# Altium PCB PCB_Prototype.PcbDoc (part 2 of 2)
Units mil, origin at the board's own origin, x right, y up, seen from the top; angles counter-clockwise.
Board outline 3779.53 x 2992.13 mil, 2 copper layers (Top Layer, Bottom Layer), stack 12.8 mil thick; 97 components, 82 nets, 386 pads, 139 vias.
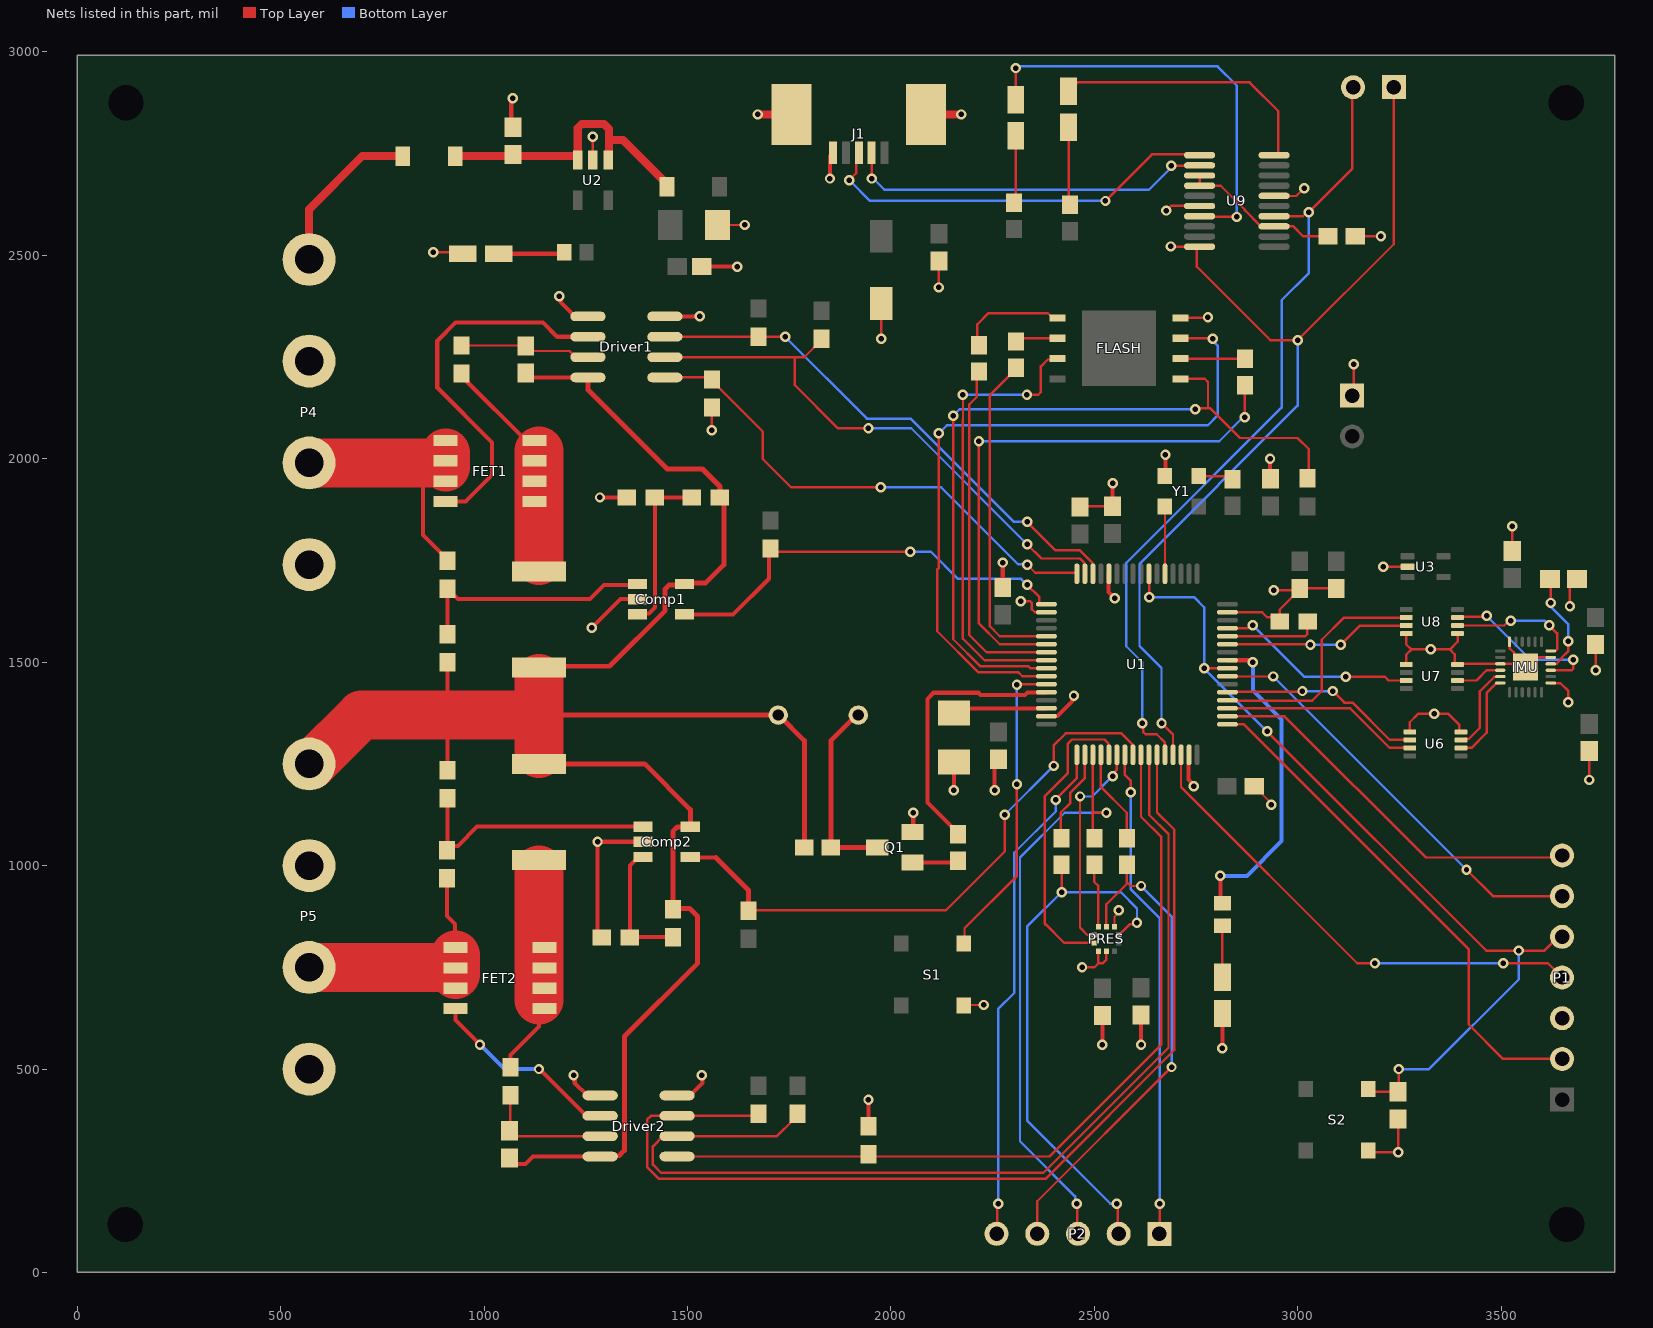
[diagram p2: the nets of this part, all layers, seen from the top]

## Via types
v1: diameter 25.5, hole 13.5, Top Layer to Bottom Layer, 76 vias
v2: diameter 25.5, hole 13.5, Top Layer to Bottom Layer, tented both sides, 54 vias
v3: diameter 27.56, hole 11.81, Top Layer to Bottom Layer, 9 vias

## Nets (pads, with @x,y where several pads share a name; then routed paths per layer and width w, separated by ;. In a path a pad name is that pad's centre, name@x,y a point inside that pad or via, vN(x,y) a via of type N, cw(c..) or ccw(c..) an arc to the next point about the centre after c; other vN are vias at no path point) (continued)
CS_IMU_1.8V: IMU.22 U7.2 | length 113.5
  Top Layer w6: U7.2@3392.99,1455.16 3439.41,1455.16 3464.57,1480.32 IMU.22@3496.06,1480.32
CS_TELE: P2.5 U1.33 | length 1259.3
  Top Layer w6: P2.5@2260,95 2261.89,96.89 2261.89,167.4 v1(2263.78,169.29) ; v1(2405.51,1161.42) 2405.51,1163.9 2457.36,1215.75 U1.33@2457.36,1272.56
  Bottom Layer w6: v1(2263.78,169.29) 2263.78,647.51 2303.49,687.22 2303.49,1031.83 2405.51,1133.86 v1(2405.51,1161.42)
GND: C1.2 C2.2 C3.1 C6.2 C7.2 C8.2 C9.2 C10.2 C11.2 C12.2 C13.2 C14.1 C15.2 C16.2 C17.1 C18.2 C19.2 C20.2 C21.1 C22.2 C23.2 C24.2 Comp1.2 Comp2.2 Driver1.4 Driver1.5 Driver2.4 Driver2.5 FLASH.4 IMU.7 IMU.11 IMU.18 IMU.21 IMU.25 J1.5 J1.6 J1.7 LED.2 P1.3 P4.1 P4.3 P5.1 P5.3 P6.1 PRES.3 PRES.8 PRES.9 PWR.2 Q1.2 R5.2 R20.1 R22.1 R29.1 R31.1 S1.2 S2.2 U1.12 U1.18 U1.31 U1.47 U1.63 U2.2 U3.2 U6.4 U6.5 U7.4 U7.5 U8.4 U8.5 U9.6 U9.16 Y1.2 | length 5069.7
  Top Layer w6: v1(875,2507.87) 943.9,2507.87 PWR.2@947.83,2503.94 ; U2.2@1267.72,2734.45 v1(1267.72,2791.34) ; v1(1560,2070) R20.1@1560,2126.1 ; C14.1@1573.82,2574.8 v1(1640.75,2574.8) ; v1(1976.38,2295.28) C22.2@1976.38,2381.89 ; v1(2118.11,2421.26) C23.2@2118.11,2486.22 ; S1.2@2179.13,656.5 2180.12,657.48 v1(2228.35,657.48) ; v2(2319,1650) 2342.45,1650 2345.97,1646.49 2345.97,1631.03 2354,1623 2361.25,1623 2361.3,1622.95 U1.18@2382.56,1622.95 ; U1.31@2382.56,1367.05 U1.31@2383.34,1367.83 ; v2@2446.43,1413.83 v2(2450.16,1417.56) ; C16.2@2460,1883.46 2543.46,1883.46 C15.2@2545,1885 ; v2(2470,750) 2500,750 2510,760 2510,789.57 PRES.8@2510.31,789.88 ; 2510.31,760.32 2521.32,760.32 2530,769 PRES.9@2530,789.88 ; C20.2@2519.76,611.3 C20.2@2520,611.54 ; U1.12@2535.32,1716.66 U1.12@2536.1,1717.44 ; PRES.3@2549.68,850.12 2549.68,874.41 2560,884.72 v2(2560,890) ; v1(2677.17,2610.24) 2677.85,2610.24 2689.32,2621.7 2758.51,2621.7 U9.16@2758.86,2621.36 ; FLASH.4@2712.2,2346.46 2712.8,2347.05 2778.94,2347.05 v1(2779.53,2347.64) v1@2783.46,2347.64 ; U1.63@2827.44,1622.95 2912.48,1622.95 2925.2,1610.24 2935.91,1610.24 2937.01,1609.14 R5.2@2937.01,1606.3 ; C9.2@2893.47,1195 2935,1153.47 v2(2935,1150) ; R5.2@2938.43,1614.17 R5.2@2940.94,1614.17 ; v1(2940.94,1677.17) C10.2@2996.06,1677.17 ; U9.6@2941.93,2646.36 2942.27,2646.01 2996.41,2646.01 v1(3015.75,2665.35) ; R5.2@2942.6,1610 R5.2@2950,1610 ; R5.2@2955.55,1600 2955.55,1629.13 2996.06,1669.65 C10.2@2996.06,1677.17 ; C13.2@3080,1680 3078.47,1681.53 C10.2@3005,1681.53 3000.63,1677.17 C10.2@2996.06,1677.17 ; P6.1@3137.8,2155.12 v1(3137.8,2232.28) ; C24.2@3141.73,2547.24 3142.09,2546.89 3142.44,2547.24 v1(3204.72,2547.24) ; S2.2@3158.15,284.45 S2.2@3158.94,285.24 ; S2.2@3166.81,295.55 v2(3246.81,295.55) ; v1(3210,1735) U3.2@3270,1735 ; v2@3246.81,300.55 C6.2@3246.81,377.09 ; U7.5@3267.01,1494.53 3267.01,1518.98 3279.53,1531.5 ; U8.4@3267.01,1570.47 3267.01,1544.02 3279.53,1531.5 ; U6.5@3275.59,1328.74 3275.59,1352.52 3295.98,1372.91 v1(3335.35,1372.91) 3370.79,1372.91 3397.64,1346.06 U6.4@3397.64,1330.71 ; U7.4@3385.83,1500 3385.83,1519.69 3374.02,1531.5 ; U6.4@3392.38,1329.61 U6.4@3406.22,1329.61 ; U7.4@3392.99,1494.53 3394.53,1496.06 IMU.21@3498.03,1496.06 IMU.25@3555.12,1496.06 ; U8.5@3392.99,1570.47 3392.99,1550.47 3374.02,1531.5 ; IMU.18@3520.67,1550.2 3521.03,1549.84 3521.03,1534.55 3521.83,1533.75 3521.83,1533.29 3532.72,1522.39 3532.72,1518.65 3539.57,1511.81 IMU.25@3543.31,1511.81 ; C21.1@3527.56,1773.62 v1(3527.56,1834.65) ; IMU.25@3574.8,1511.81 IMU.11@3622.05,1511.81 ; IMU.7@3622.05,1448.82 3645.56,1448.82 3665.35,1429.02 v1@3665.35,1405.51 ; v1(3669.29,1637.8) 3669.29,1687.01 C8.2@3687.01,1704.72 ; C8.2@3688.98,1712.6 C8.2@3692.91,1716.54 ; C17.1@3712.6,1277.56 3716.54,1273.62 v1(3716.54,1210.63) ; v1(3732.28,1480.32) C18.2@3732.28,1543.31 ; 3279.53,1531.5 v1(3326.77,1531.5) 3374.02,1531.5
  Top Layer w10: C1.2@1070.87,2814.96 1066.93,2818.9 1066.93,2882.56 v2(1070.87,2886.5) ; v2(1185,2400) 1187.96,2397.04 1187.96,2386.05 1224.01,2350 Driver1.5@1225,2350 ; v2@1220,480 1220.8,480 1222.96,477.84 1222.96,466.05 1254.01,435 Driver2.5@1285.51,435 ; v2(1265,1585) 1335,1655 Comp1.2@1376.93,1655 ; v2(1285,1905) R22.1@1350.55,1905 ; R31.1@1289.61,823.7 1279.06,834.25 1279.06,1053.7 1284.06,1058.7 Comp2.2@1384.06,1058.7 ; Driver1.4@1444.49,2350 v2(1530,2350) ; Driver2.4@1474.49,435 1505.98,435 1537.03,466.05 1537.03,477.84 1539.19,480 v2@1540,480 ; C2.2@1535.43,2472.44 v2@1618.42,2472.44 ; v1(1850.39,2688.98) 1850.39,2744.09 J1.5@1858.27,2751.97 ; R29.1@1945,360 v2(1945,425) ; Q1.2@2053.31,1082.4 2055.91,1085 2055,1085.91 v2(2055,1130) ; C7.2@2145,1254.96 C7.2@2155,1254.96 ; v2(2155,1185) 2155,1248.43 2155.79,1249.21 C7.2@2155,1250 ; S1.2@2179.13,656.5 S1.2@2188.98,646.65 ; v2(2255,1185) 2255,1245 C11.2@2265,1255 ; C11.2@2269.96,1254.96 C11.2@2270,1255 ; C12.2@2275,1683.46 v2(2275,1745) ; U1.31@2383.34,1367.83 2410.07,1367.83 2446.43,1404.18 v2@2446.43,1413.83 ; C20.2@2519.76,611.3 2520,611.06 v2(2520,560) ; U1.12@2535.32,1716.66 2535.32,1672.39 v2(2550.16,1657.56) ; C15.2@2545,1885 v2(2545,1940) ; v2(2615,560) C19.2@2615,620 ; Y1.2@2670,1960 2675,1965 v2(2675,2010) ; U1.47@2732.17,1250 2732.17,1241.09 2732,1240.91 2732,1212.19 2745,1199.19 v2(2745,1195) ; v2(2814.96,551.1) LED.2@2814.96,636.81 ; v2(2932.07,2000.32) 2932.07,1954.86 2934.61,1952.32 C3.1@2933.07,1950.79
  Top Layer w20: v1(1673.23,2846.46) J1.7@1755.91,2846.46 ; J1.6@2086.61,2846.46 v1(2173.23,2846.46)
  other v1: 3665.35,1401.57
  other v2: 1220,485 1535,485 1279.06,1058.7 1622.59,2472.44
INT_IMU_1.8V: IMU.12 U8.6 | length 317.8
  Top Layer w6: U8.6@3392.99,1590.16 3393.19,1590.35 3507.68,1590.35 3519.69,1602.36 v1(3523.62,1602.36) ; v1(3618.11,1590.55) 3637.8,1570.87 3637.8,1566.93 ; IMU.12@3622.05,1527.56 3633.86,1527.56 3637.8,1531.5 3637.8,1565.08
  Bottom Layer w6: v1(3523.62,1602.36) 3606.3,1602.36 v1(3618.11,1590.55)
INT_TELE: P2.1 U1.39 | length 1213.7
  Top Layer w6: U1.39@2575.47,1272.56 2575.47,1222.91 2590,1208.39 v1(2590,1180) ; P2.1@2660,95 2661.42,96.42 v1(2661.42,169.29)
  Bottom Layer w6: v1(2590,1180) 2590,941.41 2661.42,870 v1(2661.42,169.29)
JTDI: P1.7 U1.50 | length 966.3
  Top Layer w6: U1.50@2827.44,1367.05 2967.95,1367.05 3315,1020 P1.7@3650,1020
LED2: R7.2 U1.57 | length 774.9
  Top Layer w10: R7.2@2810,915 v1(2810,975) ; U1.57@2827.44,1504.84 2880.96,1504.84 2885,1500.81 v2@2885,1500
  Bottom Layer w10: v1(2810,975) 2875,975 2960.75,1060.75 2960.75,1359.25 2890,1430 v2(2890,1500)
LiPo: Buzz1.P$1 C4.1 C5.1 Comp1.5 Comp2.5 Driver1.8 Driver2.8 P5.4 R17.2 R19.2 R26.2 R28.2 R32.2 Rsense1.2 Rsense2.2 | length 4929.4
  Top Layer w10: R26.2@910,1230 910,1370 R17.2@910,1495 ; C5.1@1065,266.54 1101.54,266.54 1120,285 Driver2.8@1255,285 ; C4.1@1090,2201.54 1091.54,2200 Driver1.8@1240,2200
  Top Layer w12: 1135,1370 Buzz1.P$1@1715,1370 ; Rsense1.2@1135,1486.89 1138.11,1490 1308.37,1490 1445,1626.63 1445,1680 1455,1690 Comp1.5@1475,1690 ; Rsense2.2@1195,1250 1395,1250 1507.13,1137.87 Comp2.5@1507.13,1096.1 ; Driver1.8@1255.51,2200 1255.51,2169.49 1450,1975 1537,1975 1580,1932 R19.2@1580,1920 ; Driver2.8@1285.51,285 1287.33,286.82 1331.82,286.82 1345,300 1345,580 1525,760 1525,875 1505,895 R28.2@1475,895 ; R28.2@1464.06,893.15 1464.06,1084.06 1475,1095 Comp2.5@1495,1095 ; Comp1.5@1505,1695 1545,1695 1589.45,1739.45 R19.2@1589.45,1905 ; Buzz1.P$1@1720,1370 Buzz1.P$1@1723.15,1370 1725,1370 1787.52,1307.48 1787.52,1057.52 R32.2@1785,1055
  Top Layer w100: P5.4@570,1250 P5.4@578.12,1250
  Top Layer w120: P5.4@578.12,1250 698.12,1370 910,1370 1135,1370 ; 1135,1275 1135,1370 ; 1135,1460 1135,1370
NetBuzz1_P$2: Buzz1.P$2 Q1.3 R32.1 | length 457.4
  Top Layer w12: R32.1@1852.48,1045 Q1.3@1970,1045 ; R32.1@1855,1055 1852.48,1057.52 1852.48,1307.48 1910,1365 Buzz1.P$2@1915,1365
NetC1_1: C1.1 D1.2 D4.2 U2.1 U2.3 | length 714.8
  Top Layer w6: U2.3@1224.41,2744.09 U2.3@1228.35,2740.16
  Top Layer w20: D1.2@929.13,2744.09 U2.3@1224.41,2744.09 ; U2.3@1230.32,2734.45 1230.32,2812.99 1240.16,2822.83 1295.28,2822.83 1307.09,2811.02 1307.09,2783.46 1341.63,2783.46 1444.88,2680.22 D4.2@1444.88,2677.17 ; U2.1@1307.09,2744.09 1307.09,2779.53 ; D4.2@1448.82,2673.23 D4.2@1448.82,2676.28
NetC4_2: C4.2 Driver1.7 R18.2 | length 287.7
  Top Layer w6: R18.2@944.88,2278.54 C4.2@1098.54,2278.54 ; C4.2@1102.36,2277.56 1114.92,2265 1210,2265 Driver1.7@1225,2250
NetC5_2: C5.2 Driver2.7 R27.2 | length 275.2
  Top Layer w6: C5.2@1060,360 1065,365 R27.2@1065,435.55 ; C5.2@1062.99,348.43 1076.42,335 Driver2.7@1255,335
NetC7_1: C7.1 U1.30 | length 224
  Top Layer w6: C7.1@2165,1380 C7.1@2170.83,1374.17
  Top Layer w10: C7.1@2153.27,1376.73 C7.1@2154.98,1375.02 ; C7.1@2170,1385 2171.73,1386.73 U1.30@2382.56,1386.73
NetC8_1: C8.1 IMU.10 | length 245.6
  Top Layer w6: C8.1@3618.11,1692.91 3622.05,1688.98 v1(3622.05,1645.67) ; IMU.10@3622.05,1496.06 3622.41,1496.42 3636.64,1496.42 3649.13,1508.91 3649.13,1511.42 3665.35,1527.64 v1@3665.35,1547.24
  Bottom Layer w6: v1@3622.81,1652.78 3622.81,1635.73 3665.35,1593.18 v1(3665.35,1551.18)
NetC24_1: C24.1 U9.3 U9.13 U9.14 | length 374.5
  Top Layer w6: U9.13@2749.93,2700.79 2758.86,2691.86 U9.14@2758.86,2671.36 2811.05,2671.36 2870.21,2612.2 2870.21,2610.88 2910.22,2570.87 U9.3@2917.32,2570.87 ; U9.3@2941.93,2571.36 2989.32,2571.36 3013.43,2547.24 3055.12,2547.24 3059.06,2551.18 C24.1@3059.06,2539.37
NetComp1_1: Comp1.1 R17.1 R21.2 | length 577.7
  Top Layer w10: R17.1@910,1589.45 R21.2@910,1675 ; R21.2@910,1680.55 912.77,1677.78 935.55,1655 1260,1655 1295,1690 1370,1690 Comp1.1@1375,1695
NetComp1_3: Comp1.3 R19.1 R22.2 | length 420.8
  Top Layer w10: Comp1.3@1376.93,1617.6 1379.33,1620 1405,1620 1420,1635 R22.2@1420,1905 ; R22.2@1419.45,1905 R22.2@1420,1905 ; R19.1@1520,1905 R22.2@1420,1905
NetComp1_4: Comp1.4 R16.1 U1.17 | length 1054.7
  Top Layer w6: R16.1@1702.78,1767.78 1705.55,1765 R16.1@1712.21,1771.65 ; R16.1@1704.72,1779.53 1712.6,1771.65 2038.24,1771.65 2039.37,1772.79 v2@2039.37,1775.59 ; v2(2335,1690) 2365,1660 2365,1642.77 2364.86,1642.64 U1.17@2382.56,1642.64
  Top Layer w10: Comp1.4@1497.4,1617.6 1612.4,1617.6 1700,1705.2 1700,1761.89 1701.89,1763.78 R16.1@1704.72,1763.78
  Bottom Layer w6: v2(2047.24,1771.65) 2098.35,1771.65 2165,1705 2320,1705 v2(2335,1690)
NetComp2_1: Comp2.1 R26.1 R30.2 | length 631.3
  Top Layer w10: R30.2@909.06,1038.7 919.06,1048.7 935.7,1048.7 983.1,1096.1 Comp2.1@1390.98,1096.1 ; R30.2@910,1040 R26.1@910,1165.55
NetComp2_3: Comp2.3 R28.1 R31.2 | length 322.4
  Top Layer w10: Comp2.3@1390.98,1021.3 1380.16,1021.3 1359.06,1000.2 1359.06,823.7 1359.61,824.25 R28.1@1464.06,824.25
NetComp2_4: Comp2.4 R25.1 U1.40 | length 1456.8
  Top Layer w6: R25.1@1650,890 2135,890 2280,1035 v2(2280,1125) ; v2(2400,1245) 2400,1295 2430,1325 2566.62,1325 2594.04,1297.58 2594.04,1273.67 U1.40@2595.16,1272.56
  Top Layer w10: Comp2.4@1520,1020 1570,1020
  Top Layer w12: 1570,1020 1650,940 R25.1@1650,889.45
  Bottom Layer w6: v2(2280,1125) v2(2400,1245)
NetD5_1: D5.1 R35.1 | length 182.7
  Top Layer w6: R35.1@2303.15,2633.86 2307.09,2637.8 D5.1@2307.09,2814.96
NetD5_2: D5.2 U9.17 | length 1012
  Top Layer w6: v1(2307.09,2960.63) 2307.09,2904.53 D5.2@2311.02,2900.59 ; U9.17@2787.4,2598.43 2790.4,2595.42 2849.46,2595.42 v1(2850.39,2594.49)
  Bottom Layer w6: v1@2307.09,2964.57 2803.15,2964.57 2850.39,2917.32 v1(2850.39,2594.49)
NetD6_1: D6.1 R36.1 | length 203.4
  Top Layer w6: D6.1@2437.01,2814.96 2437.01,2633.86 R36.1@2452.76,2618.11
NetD6_2: D6.2 U9.10 | length 662.6
  Top Layer w6: D6.2@2437.01,2903.54 2458.66,2925.2 2881.89,2925.2 2952.76,2854.33 2952.76,2750.86 2949.93,2748.03 U9.10@2948.82,2748.03
NetDriver1_1: Driver1.1 R20.2 U1.16 | length 1236.6
  Top Layer w6: Driver1.1@1444.49,2200 R20.2@1548.32,2200 ; R20.2@1560,2195 1560,2192.05 1685,2067.05 1685,2000 1755,1930 v2(1975,1930) ; v2(2335,1740) 2355,1720 U1.16@2455,1720
  Bottom Layer w6: v2(1975,1930) 2123.59,1930 2313.25,1740.34 2334.66,1740.34 v2(2335,1740)
NetDriver1_2: Driver1.2 R14.1 U1.15 | length 1358.4
  Top Layer w6: Driver1.2@1480,2250 1763.78,2250 ; R14.1@1830,2287.6 R14.1@1830,2290.55 ; R14.1@1830,2290 1827.4,2290 1789.45,2252.05 1789.45,2250 1770,2250 1763.78,2250 ; v2@1940.94,2074.8 1870.08,2074.8 1763.78,2181.1 1763.78,2250 ; v2(2335,1790) 2370,1755 2465,1755 2475.93,1744.07 2475.93,1718.55 U1.15@2477.05,1717.44
  Top Layer w10: R14.1@1828.23,2298.78 R14.1@1830,2300.55
  Bottom Layer w6: v2(1945,2075) 2050,2075 v2(2335,1790)
NetDriver1_3: Driver1.3 R15.1 U1.14 | length 1308.8
  Top Layer w6: Driver1.3@1444.49,2300 R15.1@1675,2300 ; R15.1@1675,2300.55 1675.55,2300 v2(1740,2300) ; v2(2335,1845) 2405,1775 2464.8,1775 2495.62,1744.18 2495.62,1718.55 U1.14@2496.73,1717.44
  Bottom Layer w6: v2(1740,2300) 1941.25,2098.75 2048.76,2098.75 2302.51,1845 v2(2335,1845)
NetDriver1_6: Driver1.6 FET1.4 | length 895.2
  Top Layer w10: FET1.4@905.75,1895 955,1895 1020,1960 1020,2040 885,2175 885,2290 930,2335 1145,2335 1180,2300 Driver1.6@1220,2300
NetDriver2_1: Driver2.1 R29.2 U1.41 | length 2037.8
  Top Layer w6: Driver2.1@1474.49,285 1945,285 2390,285 2665,560 2665,1070 2614.84,1120.16 U1.41@2614.84,1272.56
NetDriver2_2: Driver2.2 R23.1 U1.42 | length 2552.3
  Top Layer w6: R23.1@1770,375 1760,375 1720,335 Driver2.2@1474.49,335 1440,335 1415,310 1415,265 1435,245 2375,245 2682.51,552.51 2682.51,1077.49 2635,1125 U1.42@2635,1255
NetDriver2_3: Driver2.3 R24.1 U1.43 | length 2532.3
  Top Layer w6: Driver2.3@1435,385 1410,385 1401,376 1401,259.2 1430.2,230 2380,230 2696.51,546.51 2696.51,1088.49 2654.21,1130.79 U1.43@2654.21,1272.56 ; Driver2.3@1474.49,385 R24.1@1670,385
NetDriver2_6: Driver2.6 FET2.4 | length 478.4
  Top Layer w10: FET2.4@929.8,648.7 929.8,620.2 v2(990,560) ; v2@1140,500 1140,497.01 1252.01,385 Driver2.6@1285.51,385
  Bottom Layer w10: v2(990,560) 1050,500 v2(1135,500)
NetFET1_1: FET1.1 FET1.2 FET1.3 P4.2 R21.1 | length 570.9
  Top Layer w10: 850,1940 850,1812.4 910,1752.4 R21.1@910,1749.45
  Top Layer w120: P4.2@570,1990 850,1990 FET1.2@890,1990 ; 905.75,1979.53 FET1.2@905.75,1995 905.75,2015
NetFET1_5: FET1.5 FET1.6 FET1.7 FET1.8 R18.1 Rsense1.1 | length 522.5
  Top Layer w10: R18.1@950,2195 952.6,2195 1105.55,2042.05 1127.6,2020 1135,2020
  Top Layer w120: 1135,1750 FET1.5@1135,1890 ; FET1.5@1135,1895 1135,2020
NetFET2_1: FET2.1 FET2.2 FET2.3 P5.2 R30.1 | length 653.9
  Top Layer w10: R30.1@909.06,969.25 909.06,875.94 929,856 929,750 929,731
  Top Layer w120: P5.2@570,750 929,750 FET2.2@929.8,750 ; 930,732.48 929.8,732.68 FET2.2@929.8,748.7 FET2.2@929.8,750 ; 930,780 FET2.2@929.8,750
NetFET2_5: FET2.5 FET2.6 FET2.7 FET2.8 R27.1 Rsense2.1 | length 525.6
  Top Layer w10: R27.1@1065,494.45 1065,535 1135,605 1135,648.7 1135,670 ; Rsense2.1@1148.31,1007.95 Rsense2.1@1149.06,1008.7
  Top Layer w120: 1135,670 1135,748.7 Rsense2.1@1135,990
NetFLASH_1: FLASH.1 R13.1 U1.25 | length 1919.8
  Top Layer w6: v1(2153.54,2106.3) 2153.54,1556.46 2220.21,1489.79 2338.39,1489.79 2343.03,1485.16 U1.25@2382.56,1485.16 ; FLASH.1@2712.2,2196.46 FLASH.1@2712.6,2196.85 ; FLASH.1@2728.35,2196.85 2771.65,2196.85 2779.53,2188.98 2779.53,2124.11 ; v1(2748.03,2122.05) 2750.1,2124.11 2779.53,2124.11 ; R13.1@3023.62,1956.69 3027.56,1960.63 3027.56,2023.62 3000,2051.18 2858.27,2051.18 2785.34,2124.11 2779.53,2124.11
  Bottom Layer w6: v1(2153.54,2106.3) 2169.29,2122.05 v1(2748.03,2122.05)
NetFLASH_2: FLASH.2 R12.1 | length 159
  Top Layer w6: FLASH.2@2712.2,2246.46 2716.54,2246.46 FLASH.2@2718.9,2246.46 ; FLASH.2@2716.54,2244.09 FLASH.2@2718.9,2246.46 ; FLASH.2@2719.69,2247.24 FLASH.2@2718.9,2246.46 ; R12.1@2866.14,2248.03 2864.57,2246.46 FLASH.2@2718.9,2246.46
NetFLASH_3: FLASH.3 U1.26 | length 1768.7
  Top Layer w6: v1(2118.11,2062.99) 2118.11,1732 2114.17,1728.06 2114.17,1576.03 2214.41,1475.79 2312.79,1475.79 2323.12,1465.47 U1.26@2382.56,1465.47 ; FLASH.3@2716.54,2295.28 FLASH.3@2717.72,2296.46 ; FLASH.3@2724.41,2295.28 2725,2295.87 2790.75,2295.87 v1(2791.34,2295.28)
  Bottom Layer w6: v1(2118.11,2062.99) 2137.67,2082.55 2779.4,2082.55 2803.15,2106.3 2803.15,2278.19 2791.34,2290 v1(2791.34,2295.28)
NetFLASH_5: FLASH.5 R2.1 | length 246.3
  Top Layer w6: R2.1@2228.35,2291.34 2220.47,2291.34 2212.6,2299.21 2212.6,2330.71 2240.16,2358.27 2385.83,2358.27 FLASH.5@2393.7,2350.39
NetFLASH_6: FLASH.6 R1.1 | length 105.2
  Top Layer w6: R1.1@2307.09,2288.39 R1.1@2313.19,2282.28 ; R1.1@2314.96,2291.34 2320.08,2296.46 FLASH.6@2409.45,2296.46
NetFLASH_7: FLASH.7 U1.24 | length 1124.3
  Top Layer w6: v1(2177.17,2157.48) 2177.29,2157.35 2177.29,2096.46 2177.17,2096.33 2177.17,1557.83 2230.16,1504.84 U1.24@2382.56,1504.84 ; v1@2338.58,2157.48 2362.2,2157.48 2368.92,2164.2 2368.92,2227.19 2385.83,2244.09 FLASH.7@2405.51,2244.09
  Bottom Layer w6: v1(2177.17,2157.48) v1(2334.65,2157.48)
NetJ1_2: J1.2 U9.12 | length 878.8
  Top Layer w6: v1(1952.75,2688.97) 1956.69,2692.91 1952.76,2696.85 J1.2@1952.76,2751.97 ; v1(2688.98,2720.47) 2689.42,2720.92 2725.54,2720.92 U9.12@2727.36,2722.74
  Bottom Layer w6: v1(1952.75,2688.97) 1956.7,2688.97 1984.25,2661.42 2634.55,2661.42 2685.04,2711.91 v1@2685.04,2720.47
NetJ1_3: J1.3 U9.11 | length 997.9
  Top Layer w6: v1@1897.64,2692.91 1899.14,2691.41 1904.01,2691.41 1914.42,2701.82 1914.42,2745.13 J1.3@1921.26,2751.97 ; v1(2527.56,2633.86) 2641.86,2748.16 2724.28,2748.16 U9.11@2728.35,2744.09 ; U9.11@2723.43,2750.3 2727.36,2746.36 U9.11@2739.17,2746.36 ; U9.11@2731.32,2750.86 2733.66,2748.52 U9.11@2735.24,2748.52
  Bottom Layer w6: v1(1897.64,2685.04) 1948.82,2633.86 v1(2527.56,2633.86)
NetLED_1: LED.1 R7.1 | length 123.3
  Top Layer w6: LED.1@2809.92,737.32 LED.1@2809.96,737.36 ; LED.1@2815,736.26 R7.1@2815,852.44
  Top Layer w10: LED.1@2809.96,721.1 LED.1@2814.96,726.1
NetP2_2: P2.2 PRES.2 R3.2 | length 1329.6
  Top Layer w6: v2(2420,935) R3.2@2420,1000 ; v1(2555.12,169.29) 2557.5,166.91 2557.5,102.5 P2.2@2565,95 ; PRES.2@2560.12,829.84 2561.1,829.84 2587.53,856.27 2601.27,856.27 v2(2605,860)
  Bottom Layer w6: v1@2546.1,169.29 2539.37,169.29 2335,373.66 2335,850 v2(2420,935) 2565,935 2605,895 v2(2605,860)
NetP2_3: P2.3 R11.1 U1.35 | length 1456.6
  Top Layer w6: P2.3@2445,100 2458.35,113.35 2458.35,167.64 v1(2456.69,169.29) ; R11.1@2496.73,1070.75 2496.73,1129.92 ; U1.35@2496.73,1254.22 2496.73,1129.92 ; v1@2527.56,1129.92 2496.73,1129.92
  Top Layer w10: U1.35@2495.95,1255 U1.35@2496.73,1254.22 ; R11.1@2496.73,1070.75 R11.1@2500,1067.48
  Bottom Layer w6: v1@2452.76,173.23 2452.96,173.43 2452.96,187.04 2317.49,322.51 2317.49,1020.12 2427.37,1130 v1(2530,1130)
NetP2_4: P2.4 PRES.4 R4.2 | length 1214.6
  Top Layer w6: P2.4@2355,110 2360,115 2360,175 v1(2690,505) ; PRES.4@2530,850.12 2530,905 2580,955 2580,960 ; R4.2@2580,995 2580,960 ; v1(2615,950) 2590,950 2580,960
  Bottom Layer w6: v1(2615,950) 2690,875 v1(2690,505)
NetP3_1: P3.1 U1.45 U9.20 | length 2346.5
  Top Layer w6: v1(2665.35,1350.39) 2693.58,1322.16 U1.45@2693.58,1272.56 ; v1(2687.99,2521.95) 2688.29,2521.65 2732.19,2521.65 U9.20@2732.48,2521.36 ; U9.20@2755.91,2523.62 2751.97,2519.68 2751.97,2472.44 2933.07,2291.34 v1(3000,2291.34) 3236.22,2527.56 P3.1@3236.22,2905.51
  Bottom Layer w6: v1(2665.35,1350.39) 2665.35,1485.82 2611.25,1539.92 2611.25,1741.91 3000,2130.66 v1(3000,2291.34)
NetP3_2: P3.2 U1.44 U9.4 | length 2005
  Top Layer w6: v1(2618.11,1350.39) 2620.18,1348.33 2620.18,1328.64 2625.98,1322.83 2653.54,1322.83 2672.79,1303.59 2672.79,1273.67 U1.44@2673.9,1272.56 ; U9.4@2941.93,2596.36 3012.34,2596.36 3018.55,2602.57 3019.48,2602.57 v1@3019.69,2602.36 ; v1@3031.5,2610.24 3133.86,2712.6 3133.86,2900 3128.35,2905.51 P3.2@3137.8,2905.51
  Bottom Layer w6: v1(2618.11,1350.39) 2618.11,1500 2578.74,1539.37 2578.74,1744.09 2960.63,2125.98 2960.63,2389.76 3027.56,2456.69 v1(3027.56,2606.3)
NetPRES_5: PRES.5 R11.2 | length 144.2
  Top Layer w6: R11.2@2500,990 2500,960 2510.31,949.69 PRES.5@2510.31,850.12
NetPRES_6: PRES.6 U1.38 | length 505.9
  Top Layer w6: v2(2465,1170) 2465,847.69 2482.85,829.84 PRES.6@2499.88,829.84 ; v2(2545,1220) 2545,1225.28 2555.79,1236.06 2555.79,1255.24 U1.38@2555.12,1255.91
  Bottom Layer w6: v2(2465,1170) 2495,1170 v2(2545,1220)
NetPRES_7: PRES.7 U1.37 | length 745
  Top Layer w6: 2380,855 2380,856.41 ; PRES.7@2500,810 PRES.7@2499.88,810.16 2426.26,810.16 2380,856.41 ; U1.37@2536.1,1272.56 2534.99,1273.67 2534.99,1300.01 2525,1310 2445,1310 2435,1300 2435,1227.5 2377.82,1170.32 2377.82,858.59 2380,856.41
NetPWR_1: PWR.1 R6.1 | length 139.1
  Top Layer w12: PWR.1@1036.42,2503.94 PWR.1@1038.98,2506.5 ; PWR.1@1051.18,2503.94 1181.1,2503.94 R6.1@1185.04,2507.87
NetQ1_1: Q1.1 R33.2 | length 112.7
  Top Layer w10: Q1.1@2053.31,1007.6 2162.6,1007.6 R33.2@2165,1010
NetR1_2: R1.2 U1.21 | length 817.4
  Top Layer w6: R1.2@2311.02,2228.35 2311.02,2224.41 2243.33,2156.72 2243.33,1588.36 2267.79,1563.9 U1.21@2382.56,1563.9
NetR2_2: R2.2 U1.23 | length 875.5
  Top Layer w6: R2.2@2213.58,2220.47 R2.2@2220.47,2220.47 ; R2.2@2221.46,2216.54 2211.66,2206.74 2211.66,2152.61 2192.79,2133.73 2192.79,1567.21 2235.47,1524.53 U1.23@2382.56,1524.53
NetR3_1: R3.1 U1.34 | length 216.3
  Top Layer w6: R3.1@2421.26,1082.68 2417.32,1086.61 2417.32,1129.92 2441.25,1153.85 2441.25,1179.84 2477.05,1215.63 U1.34@2477.05,1272.56
NetR4_1: R4.1 U1.36 | length 218.9
  Top Layer w6: U1.36@2516.42,1272.56 2516.42,1193.58 2580,1130 R4.1@2580,1080
NetR5_1: R5.1 U1.60 | length 212
  Top Layer w6: U1.60@2827.44,1563.9 3018.5,1563.9 3023.62,1569.02 R5.1@3023.62,1582.68
NetR12_2: R12.2 U1.22 | length 1393.8
  Top Layer w6: v1(2216.54,2043.31) 2216.54,1595.35 2267.68,1544.21 U1.22@2382.56,1544.21 ; v1(2870.08,2102.36) 2870.08,2157.48 2875.98,2163.39 2870.08,2169.29 R12.2@2870.08,2182.09
  Bottom Layer w6: v1(2216.54,2043.31) 2807.09,2043.31 v1@2866.14,2102.36
NetR33_1: R33.1 U1.28 | length 662.7
  Top Layer w10: R33.1@2165,1085 2160.43,1085 2090,1155.43 2090,1410 2105,1425 2215,1425 2220.75,1419.25 2329.25,1419.25 2336.1,1426.1 U1.28@2382.56,1426.1
NetR34_1: R34.1 Y1.1 | length 85.7
  Top Layer w6: Y1.1@2756.34,1957.4 2757.06,1956.69 2823.31,1956.69 R34.1@2835,1945
  Top Layer w10: R34.1@2843.66,1951.18 R34.1@2845,1952.52
NetS1_1: S1.1 U1.27 | length 761.2
  Top Layer w6: S1.1@2192.91,814.96 2181.1,826.77 2181.1,846.1 2310,975 v1(2310,1200) ; v1(2310,1445) 2310.39,1445.39 2382.16,1445.39 U1.27@2382.56,1445.79
  Bottom Layer w6: v1(2310,1200) v1(2310,1445)
NetU1_5: U1.5 Y1.3 | length 149.6
  Top Layer w6: U1.5@2673.9,1735.78 Y1.3@2673.9,1878.9
  Top Layer w10: Y1.3@2673.66,1882.6 2673.9,1882.36 2673.9,1878.9 Y1.3@2675,1880 ; U1.5@2673.9,1735.78 U1.5@2674.68,1735
NetU1_51: U1.51 U6.7 | length 478.1
  Top Layer w6: U1.51@2827.44,1386.73 3129.02,1386.73 3226.38,1289.37 3258.91,1289.37 3259.84,1290.31 U6.7@3259.84,1291.34 ; U6.7@3273.52,1289.37 U6.7@3276.3,1286.59
NetU1_52: U1.52 U8.2 | length 583
  Top Layer w6: U1.52@2842.52,1405.51 2842.65,1405.38 3035.31,1405.38 3059.06,1429.13 3059.06,1555.12 3113.78,1609.84 U8.2@3267.01,1609.84
NetU1_53: U1.53 U6.6 | length 488.7
  Top Layer w6: U1.53@2827.44,1426.1 2828.55,1427.21 3009.89,1427.21 v1(3011.81,1429.13) ; v1(3086.61,1429.13) 3115.02,1400.73 3134.81,1400.73 3226.49,1309.06 3258.91,1309.06 U6.6@3259.84,1309.99 ; U6.6@3263.78,1309.99 U6.6@3263.78,1311.02 ; U6.6@3265.65,1309.06 U6.6@3268.43,1311.83
  Bottom Layer w6: v1(3011.81,1429.13) v1(3086.61,1429.13)
NetU1_59: U1.59 U8.3 | length 449
  Top Layer w6: U1.59@2827.44,1544.21 2827.89,1543.76 3031.04,1543.76 v1(3031.5,1543.31) ; v1(3106.3,1543.31) 3153.15,1590.16 3255.51,1590.16 U8.3@3255.91,1590.55 ; U8.3@3259.45,1590.16 U8.3@3259.84,1590.55
  Bottom Layer w6: v1(3031.5,1543.31) v1(3106.3,1543.31)
NetU1_61: U1.61 U7.7 | length 488.1
  Top Layer w6: U1.61@2827.44,1583.58 2877.52,1583.58 2884.49,1590.55 v1(2889.76,1590.55) ; v1(3118.11,1464.57) 3214.02,1464.57 3223.43,1455.16 3254.37,1455.16 U7.7@3255.91,1456.69
  Bottom Layer w6: v1(2889.76,1590.55) 3015.75,1464.57 v1(3118.11,1464.57)
NJTRST: C6.1 P1.5 S2.1 U1.7 U1.56 | length 2157.2
  Top Layer w6: v2(2635,1660) U1.7@2635,1695 ; v2(2770,1485) 2770.08,1485.08 U1.56@2809.92,1485.08 ; v2(2925,1330) 3463.66,791.34 v1(3543.31,791.34) 3606.34,791.34 3645,830 P1.5@3645,826.77 ; S2.1@3159.92,435.24 S2.1@3160.71,436.02 ; S2.1@3161.81,445.55 3163.35,444.02 C6.1@3246.81,444.02 3248.03,445.24 v1(3248.03,500) ; S2.1@3166.81,450.55 S2.1@3168.3,452.04 ; P1.5@3639.96,825 P1.5@3641.73,826.77
  Bottom Layer w6: v2(2635,1660) 2745,1660 2770,1635 v2(2770,1485) v2(2925,1330) ; v1(3248.03,500) 3322.83,500 3543.31,720.47 v1(3543.31,791.34)
SPI3_MISO_1.8V: IMU.9 U8.7 | length 395.8
  Top Layer w6: U8.7@3405.51,1610.24 3405.51,1611.78 3405.74,1612.01 3462.4,1612.01 v1(3464.57,1614.17) ; IMU.9@3622.05,1480.32 3622.41,1480.67 3647.87,1480.67 ; 3649.61,1480.32 3673.23,1480.32 3677.03,1484.12 3677.03,1505.73 v1(3677.17,1505.87)
  Bottom Layer w6: v1(3464.57,1614.17) 3572.87,1505.87 v1(3677.17,1505.87)
SPI3_MOSI_1.8V: IMU.24 U6.2 | length 216.8
  Top Layer w6: U6.2@3407.48,1289.37 3413.39,1289.37 3427.17,1289.37 3464.57,1326.77 3464.57,1424.21 3489.17,1448.82 IMU.24@3498.03,1448.82 ; U6.2@3413.39,1287.4 U6.2@3415.35,1289.37 ; IMU.24@3496.06,1449.63 IMU.24@3496.35,1449.63
SPI3_SCK_1.8V: IMU.23 U6.3 | length 198.8
  Top Layer w6: U6.3@3409.45,1311.02 3410.26,1311.83 3420.74,1311.83 3447.57,1338.67 3447.57,1428.34 3483.44,1464.21 3491.77,1464.21 IMU.23@3492.13,1464.57
SW_CLK: P1.2 U1.49 | length 1271.6
  Top Layer w6: U1.49@2827.44,1347.36 2867.64,1347.36 3420,795 3420,610 3505,525 P1.2@3650,525
SWDIO: P1.4 U1.46 | length 1212
  Top Layer w6: U1.46@2713.27,1272.56 2713.27,1193.14 3146.41,760 3188.82,760 v2@3188.98,759.84 ; v2(3505,760) 3615,760 3645,730 P1.4@3645,720
  Bottom Layer w6: v2(3190,760) v2(3505,760)
SWO: P1.6 U1.55 | length 1056.5
  Top Layer w6: U1.55@2827.44,1465.47 2827.91,1465 v2(2940,1465) ; v2@3420,990 v2(3415,990) 3479.8,925.2 3649.61,925.2 P1.6@3653.54,921.26
  Bottom Layer w6: v2(2940,1465) v2(3415,990)
VCC: D1.1 P4.4 | length 398.8
  Top Layer w20: P4.4@570,2490 570,2613.31 700.79,2744.09 D1.1@791.34,2744.09
pads on no net: FLASH.9 IMU.1 IMU.2 IMU.3 IMU.4 IMU.5 IMU.6 IMU.14 IMU.15 IMU.16 IMU.17 IMU.19 IMU.20 J1.4 M1.3 M2.3 M3.3 M4.3 S1.3 S1.4 S2.3 S2.4 U1.2 U1.3 U1.4 U1.6 U1.8 U1.9 U1.10 U1.11 U1.20 U1.29 U1.54 U1.58 U1.62 U2.4 U3.4 U7.3 U7.6 U9.1 U9.2 U9.5 U9.7 U9.8 U9.9 U9.18 U9.19
copper on no net:
  other v3: 2623.82,2204.53 2500.79,2205.51 2561.81,2208.46 2561.81,2264.57 2625.79,2264.57 2495.87,2267.52 2626.77,2325.59 2559.84,2326.57 2496.85,2327.56

## Polygon pours and split planes (outlines as drawn)
3.3V on Top Layer "Top Layer-No Net 2" (solid, pour order 51): 2600,1455 2585,1470 2582,1473 2602,1473
3.3V on Top Layer "Top Layer-No Net 2" (solid, pour order 45): 2555,1492 2570,1477 2573,1474 2553,1474
GND on Bottom Layer "Bottom Layer-No Net" (solid, pour order 55): 0,2987.13 0,-5 3779.53,-5 3779.53,2987.13

## Silkscreen, mask and mechanical layers (free items; w line width, h text height)
Top Overlay:
  text "Tx" at 3114.17,2842.52 h40 r270
  text "Rx" at 3224.41,2834.65 h40 r270
  text "RX" at 2275.59,2688.98 h40
  text "TX" at 2401.57,2688.98 h40
  text "UMSATS / Avionics /    - v3 -" at 3311.02,2606.3 h160 r270
  text "+" at 65,2555 h40
  text "Comp" at 55,2505 h60 r270
  text "-" at 95,2230 h40 r90
  text "GND" at 3204.72,2228.35 h40 r270
  text "3v3" at 3204.72,2074.8 h40 r270
  text "Drogue" at 55,2030 h60 r270
  text "+" at 80,1310 h40
  text "Pyro" at 65,1240 h60 r270
  text "X ^ / Y < / Z o" at 3515.75,1141.73 h70
  text "JTDI" at 3476.38,1007.87 h30
  text "-" at 100,945 h40 r90
  text "SWO" at 3492.13,909.45 h30
  text "NJTRST" at 3409.45,818.9 h30
  text "Main" at 60,730 h60 r270
  text "SWDIO" at 3444.88,708.66 h30
  text "GND" at 3500,610.24 h30
  text "USR" at 2031.5,551.18 h60
  text "SW_CLK" at 3409.45,507.87 h30
  text "3v3" at 3488.19,409.45 h30
  text "CS_TELE" at 2279.53,216.54 h30 r90
  text "MOSI_TELE" at 2377.95,216.54 h30 r90
  text "MISO_TELE" at 2472.44,216.54 h30 r90
  text "SCK_TELE" at 2570.87,216.54 h30 r90
  text "INT_TELE" at 2677.17,212.6 h30 r90
  text "RST" at 3023.62,196.85 h60
Bottom Overlay:
  drawing of 27 lines, arcs and shapes, not listed
  text "UMSATS Rocketry Flight Computer 2020" at 3451,694.5 h40 r270
Mechanical 1:
  the board outline again, w10

## Text inside footprints (layer, text, board x,y; h text height)
Buzz1: Top Overlay "PIEZO" at 1727.04,1446.81 h73.82
J1: Mechanical 1 "PCB EDGE" at 2261.26,2991.97 h11.81 r180